# EAGLE board PCB0M8B3 (EAGLE 6.2)
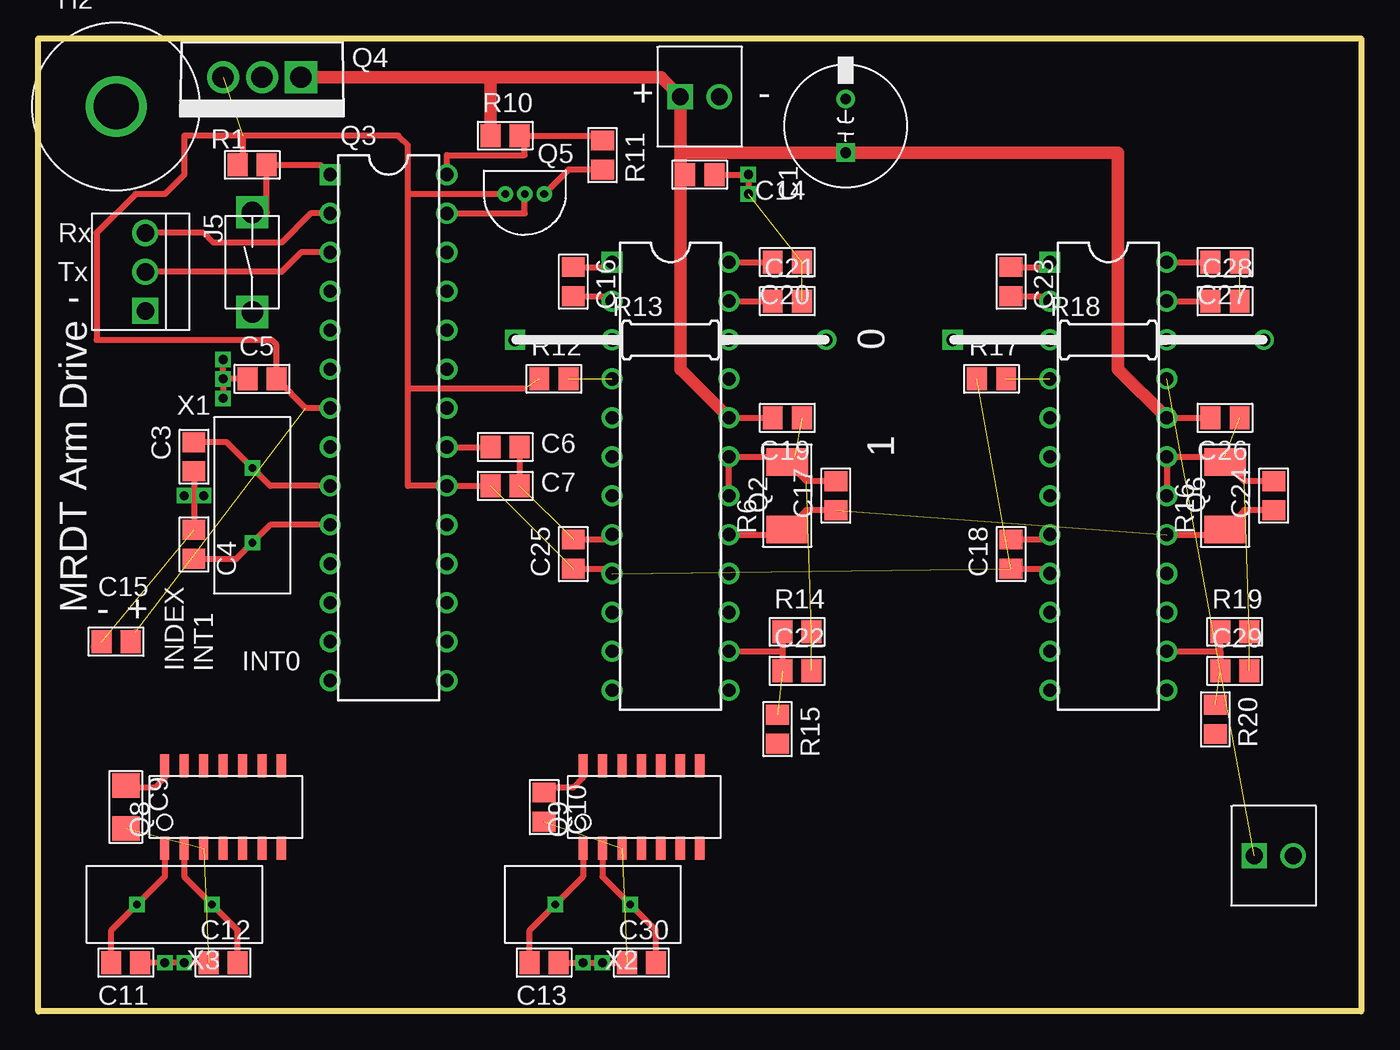
[diagram p0: board, top side]
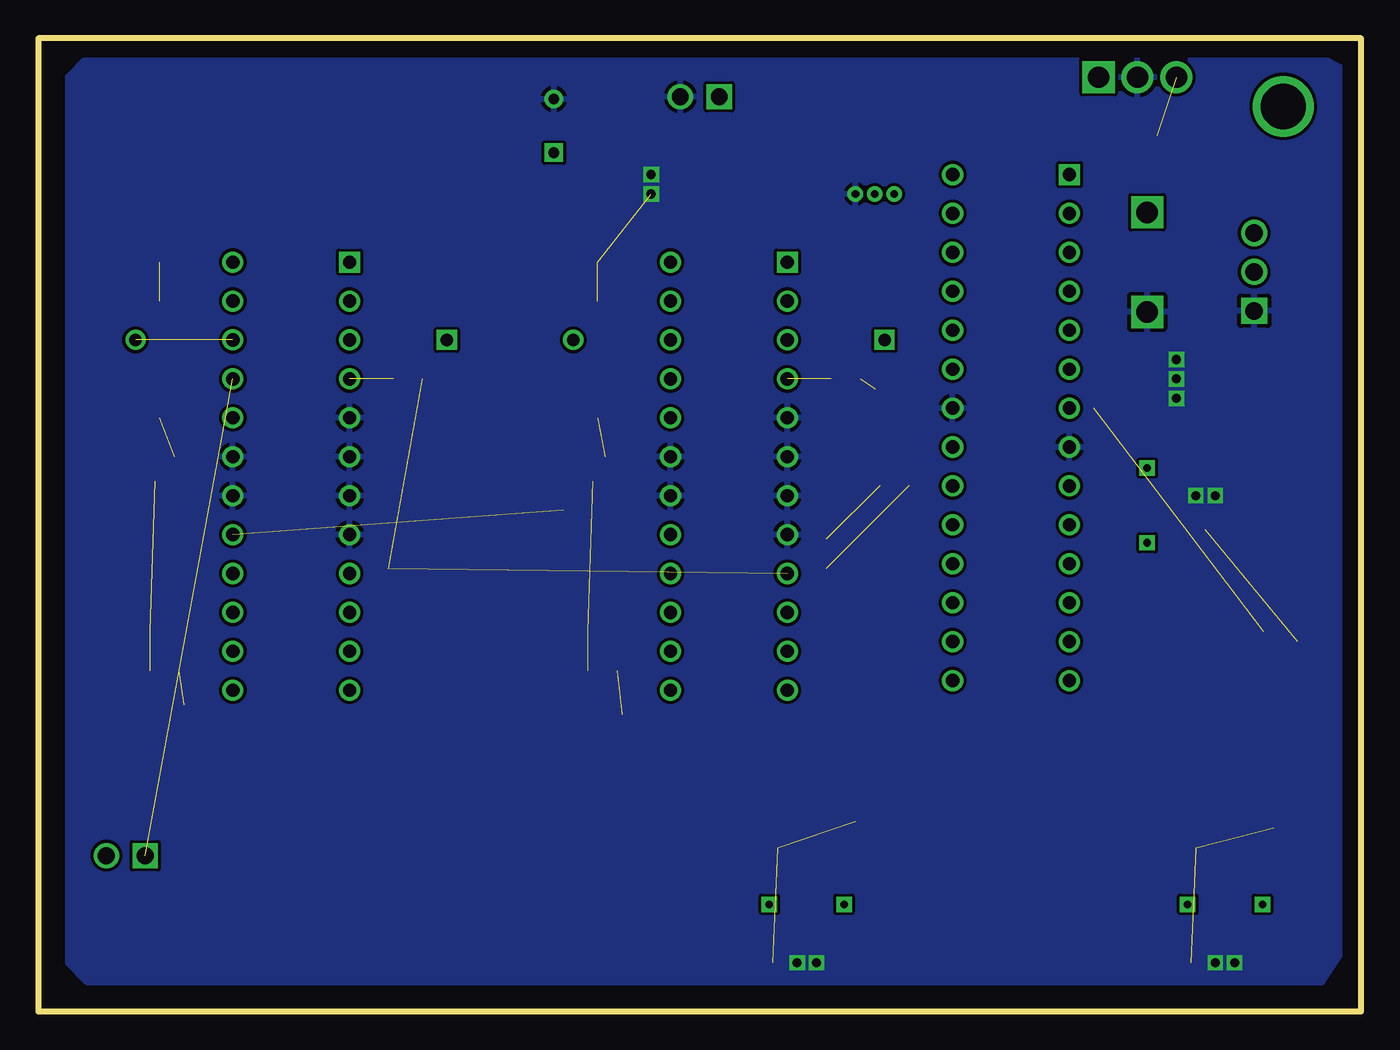
[diagram p1: board, bottom side, seen from below]

Size 86.36 x 63.5 mm. Coordinates in mm from the lower left corner, seen from the top.
Outline: 0,0 0,63.5 86.36,63.5 86.36,0 0,0
Copper layers (1*16): Top 0.035mm / dielectric 1.5mm / Bottom 0.035mm
Design rules: minimum track width 10mil, minimum drill 15mil, track to track 8mil, track to pad 8mil, pad to pad 8mil, via to via 8mil, smd to smd 8mil, copper to edge 40mil, drill to drill 8mil, minimum pad ring 10mil, minimum via ring 8mil, stop-mask expansion 4mil, vias tented up to drill 0mil, thermal gap 10mil

## Footprints (pad centres in the part's own frame; a part is rotated, then mirrored left to right if it is on the bottom)
C_8MM = drill 0.7 square: + -1.75,0 | drill 0.7: - 1.75,0
C_0805 = smd 1.3 x 1.5: 1 -0.95,0; 2 0.95,0
C_1206 = smd 1.6 x 1.8: 1 -1.4,0; 2 1.4,0
H_MNTHOLE_#4 = drill 2.946: 1 0,0
J_2.54MM = drill 1.1 square: P$1 -1.27,0 | drill 1.1: P$2 1.27,0
J_TOGGLE = drill 1.4 square: P$1 -3.25,0; P$2 3.25,0
J_MTA100_3P = drill 1.143 square: 1 2.54,0 | drill 1.143: 2 0,0; 3 -2.54,0
DIP24 = drill 0.864 square: 1 -16.51,-3.81 | drill 0.864: 2 -13.97,-3.81; 3 -11.43,-3.81; 4 -8.89,-3.81; 5 -6.35,-3.81; 6 -3.81,-3.81; 7 -1.27,-3.81; 8 1.27,-3.81; 9 3.81,-3.81; 10 6.35,-3.81; 11 8.89,-3.81; 12 11.43,-3.81; 13 11.43,3.81; 14 8.89,3.81; 15 6.35,3.81; 16 3.81,3.81; 17 1.27,3.81; 18 -1.27,3.81; 19 -3.81,3.81; 20 -6.35,3.81; 21 -8.89,3.81; 22 -11.43,3.81; 23 -13.97,3.81; 24 -16.51,3.81
DIP28 = drill 0.864 square: 1 -16.51,-3.81 | drill 0.864: 2 -13.97,-3.81; 3 -11.43,-3.81; 4 -8.89,-3.81; 5 -6.35,-3.81; 6 -3.81,-3.81; 7 -1.27,-3.81; 8 1.27,-3.81; 9 3.81,-3.81; 10 6.35,-3.81; 11 8.89,-3.81; 12 11.43,-3.81; 13 13.97,-3.81; 14 16.51,-3.81; 15 16.51,3.81; 16 13.97,3.81; 17 11.43,3.81; 18 8.89,3.81; 19 6.35,3.81; 20 3.81,3.81; 21 1.27,3.81; 22 -1.27,3.81; 23 -3.81,3.81; 24 -6.35,3.81; 25 -8.89,3.81; 26 -11.43,3.81; 27 -13.97,3.81; 28 -16.51,3.81
TO-220 = drill 1.397 square: 1 -2.54,0 | drill 1.397: 2 0,0; 3 2.54,0
TO-92-3 = drill 0.5: 1 1.27,0; 2 0,0; 3 -1.27,0
SOIC14 = smd 1.5 x 0.6: 1 -2.7,0; 2 -2.7,-1.27; 3 -2.7,-2.54; 4 -2.7,-3.81; 5 -2.7,-5.08; 6 -2.7,-6.35; 7 -2.7,-7.62; 8 2.7,-7.62; 9 2.7,-6.35; 10 2.7,-5.08; 11 2.7,-3.81; 12 2.7,-2.54; 13 2.7,-1.27; 14 2.7,0
R_0805 = smd 1.3 x 1.5: 1 -0.95,0; 2 0.95,0
R_2010 = smd 1.8 x 2.7: 1 -2.2,0; 2 2.2,0
R_1/4WL = drill 0.8 square: 1 -10.16,0 | drill 0.8: 2 10.16,0
HC-49 = drill 0.5 square: P$1 -2.44,0; P$2 2.44,0

## Placement (x,y rotation side)
C1  330uF  [C_8MM]  52.7,57.78 90 top
C3  15pF  [C_0805]  10.16,36.2 90 top
C4  [C_0805]  10.16,30.48 270 top
C5  [C_0805]  14.61,41.27 0 top
C6  [C_0805]  30.48,36.83 0 top
C7  [C_0805]  30.48,34.29 0 top
C9  [C_1206]  5.71,13.34 270 top
C10  [C_0805]  33.02,13.34 270 top
C11  [C_0805]  5.71,3.17 180 top
C12  [C_0805]  12.06,3.17 0 top
C13  [C_0805]  33.02,3.17 180 top
C14  [C_0805]  43.18,54.61 0 top
C15  [C_0805]  5.08,24.13 180 top
C16  0.22uF  [C_0805]  34.92,47.62 270 top
C17  [C_0805]  52.07,33.66 90 top
C18  [C_0805]  63.5,29.84 90 top
C19  [C_0805]  48.9,38.73 180 top
C20  [C_0805]  48.9,48.9 180 top
C21  [C_0805]  48.9,46.35 0 top
C22  0.1uF  [C_0805]  49.53,22.23 0 top
C23  0.22uF  [C_0805]  63.5,47.62 270 top
C24  [C_0805]  80.64,33.66 90 top
C25  [C_0805]  34.92,29.84 90 top
C26  [C_0805]  77.47,38.73 180 top
C27  [C_0805]  77.47,48.9 180 top
C28  [C_0805]  77.47,46.35 0 top
C29  0.1uF  [C_0805]  78.11,22.23 0 top
C30  [C_0805]  39.37,3.17 0 top
H1  [H_MNTHOLE_#4]  106.05,34.92 0 top  (outside the outline)
H2  [H_MNTHOLE_#4]  5.08,59.05 0 top
J1  J_1546074-2282834-2  [J_2.54MM]  43.18,59.69 0 top
J2  J_1546074-2282834-2  [J_2.54MM]  80.64,10.16 0 top
J4  J_MC32857  [J_TOGGLE]  13.97,48.9 90 top
J5  [J_MTA100_3P]  6.99,48.26 270 top
Q2  A3959  [DIP24]  41.27,32.38 270 top
Q3  ATMEGA328P  [DIP28]  22.86,38.1 270 top
Q4  LDO  [TO-220]  14.61,60.96 180 top
Q5  LM35  [TO-92-3]  31.75,53.34 0 top
Q6  A3959  [DIP24]  69.85,32.38 270 top
Q8  Q_LFLS7366R-S  [SOIC14]  8.26,13.34 90 top
Q9  Q_LFLS7366R-S  [SOIC14]  35.56,13.34 90 top
R1  200  [R_0805]  13.97,55.24 180 top
R6  [R_2010]  48.9,33.66 90 top
R10  [R_0805]  30.48,57.15 0 top
R11  [R_0805]  36.83,55.88 270 top
R12  51k  [R_0805]  33.66,41.27 0 top
R13  [R_1/4WL]  41.27,43.81 0 top
R14  10k  [R_0805]  49.53,24.77 0 top
R15  1k  [R_0805]  48.26,18.41 270 top
R16  [R_2010]  77.47,33.66 90 top
R17  51k  [R_0805]  62.23,41.27 0 top
R18  [R_1/4WL]  69.85,43.81 0 top
R19  10k  [R_0805]  78.11,24.77 0 top
R20  1k  [R_0805]  76.83,19.05 270 top
X1  HC49S  [HC-49]  13.97,33.02 90 top
X2  X_HC49SCRYSTAL  [HC-49]  36.2,6.99 180 top
X3  X_HC49SCRYSTAL  [HC-49]  8.89,6.99 180 top

## Library data of the parts
C1 J1 J2 J4 Q2-Q6 Q8 Q9 R13 R18 X1-X3 = PCB0M1
C3-C7 C9-C30 R1 R6 R10-R12 R14-R17 R19 R20 = Lib_Passive
H1 H2 J5 = Lib_TH

## Nets
D: J5.2 Q3.3
GND: C1.- C3.1 C4.1 C5.1 C6.2 C7.2 C9.2 C10.2 C11.1 C12.1 C13.1 C14.2 C15.2 C17.2 C18.2 C19.1 C20.1 C21.2 C22.2 C24.2 C25.2 C26.1 C29.2 C30.1 J1.P$2 J4.P$1 J5.1 Q2.5 Q2.6 Q2.7 Q2.8 Q2.18 Q2.19 Q3.8 Q3.22 Q4.2 Q5.1 Q6.5 Q6.6 Q6.7 Q6.8 Q6.18 Q6.19 Q8.3 Q9.3 R6.2 R11.2 R14.2 R16.2 R19.2
ISENSE: C17.1 C24.1 Q2.17 Q6.17 R6.1 R16.1
N$1: C4.2 Q3.10 X1.P$1
N$2: C3.2 Q3.9 X1.P$2
N$3: C9.1 Q8.14
N$4: Q3.27 Q5.2
N$5: Q3.28 R10.2 R11.1
N$6: C6.1 Q3.21
N$8: J4.P$2 Q3.1 R1.1
N$9: C10.1 Q9.14
N$10: C12.2 Q8.2 X3.P$1
N$11: C16.1 Q2.1
N$12: C16.2 Q2.2
N$13: C11.2 Q8.1 X3.P$2
N$14: Q2.4 R12.2
N$15: C20.2 Q2.24
N$16: C21.1 Q2.23
N$17: Q2.22 R13.2
N$18: C23.1 Q6.1
N$19: C13.2 Q9.1 X2.P$2
N$20: C23.2 Q6.2
N$21: C30.2 Q9.2 X2.P$1
N$22: Q6.4 R17.2
N$23: C27.2 Q6.24
N$24: C28.1 Q6.23
N$25: Q6.22 R18.2
N$26: C27.1 C28.2
OUTA: J2.P$2
OUTB: J2.P$1 Q6.21
R: J5.3 Q3.2
REF2: C22.1 Q2.14 R14.1 R15.1
REF3: C29.1 Q6.14 R19.1 R20.1
V5: C5.2 C7.1 C15.1 C18.1 C25.1 Q2.9 Q3.7 Q3.20 Q4.3 Q5.3 Q6.9 R1.2 R12.1 R17.1
VIN: C1.+ C14.1 C19.2 C26.2 J1.P$1 Q2.20 Q4.1 Q6.20 R10.1

## Tracks (layer width: path | path; a pad name or v marks a point on that pad's centre or on a via)
D
  Top 0.406: Q3.3 17.14,49.53 15.88,48.26 J5.2
GND  (via drill 0.6)  (14 unrouted)
  Top 0.406: C6.2 C7.2 | R11.2 34.61,54.93 Q5.1 | C5.1 v12.06,41.27 | v12.06,41.27 v12.06,42.55 | v12.06,41.27 v12.06,40.01 | C14.2 v46.35,54.61 v46.35,53.34 | C3.1 10.16,33.66 | v10.79,33.66 10.16,33.66 | v9.53,33.66 10.16,33.66 | 10.16,33.66 C4.1 | C13.1 v35.56,3.17 v36.83,3.17 C30.1 | C12.1 v9.53,3.17 v8.26,3.17 C11.1 | C17.2 50.15,34.6 49.36,35.39 | 49.36,35.39 R6.2 | C24.2 78.72,34.6 R16.2 77.47,36.2 Q6.19 Q6.18 | C25.2 37.15,30.8 Q2.8 | C18.2 65.72,30.8 Q6.8 | 49.36,35.39 49.36,36.2 Q2.19 Q2.18
  Top 0.813: 3.81,23.81 C15.2
  pour Bottom: 1.27,61.59 2.54,62.23 83.19,62.23 84.45,60.96 84.45,3.17 83.19,1.91 2.54,1.91 1.27,3.81
ISENSE  (1 unrouted)
  Top 0.406: C17.1 50.15,32.7 R6.1 48.9,31.11 Q2.17 | C24.1 78.72,32.7 R16.1 77.47,31.11 Q6.17
N$1
  Top 0.406: Q3.10 15.14,31.75 X1.P$1 12.92,29.53 C4.2
N$2
  Top 0.406: Q3.9 15.14,34.29 X1.P$2 12.29,37.15 C3.2
N$3
  Top 0.406: Q8.14 8.26,15.24 7.62,14.61 5.84,14.61 C9.1
N$4
  Top 0.406: Q3.27 31.75,52.07 Q5.2
N$5
  Top 0.406: Q3.28 26.67,55.88 31.75,55.88 31.75,57.15 | R10.2 31.75,57.15 | 31.75,57.15 36.51,57.15 R11.1
N$6
  Top 0.406: Q3.21 C6.1
N$8
  Top 0.406: J4.P$2 14.92,52.15 R1.1 18.41,55.24 Q3.1
N$9
  Top 0.406: Q9.14 35.56,15.24 34.92,14.61 33.34,14.61 C10.1
N$10
  Top 0.406: Q8.2 9.53,8.79 X3.P$1 13.02,5.3 C12.2
N$11
  Top 0.406: C16.1 37.15,48.58 Q2.1
N$12
  Top 0.406: C16.2 37.15,46.67 Q2.2
N$13
  Top 0.406: Q8.1 8.26,8.79 X3.P$2 4.76,5.3 C11.2
N$14  (1 unrouted)
N$15
  Top 0.406: Q2.24 C20.2
N$16
  Top 0.406: Q2.23 C21.1
N$17
  Top 0.406: R13.2 Q2.22
N$18
  Top 0.406: C23.1 65.72,48.58 Q6.1
N$19
  Top 0.406: C13.2 32.07,5.3 X2.P$2 35.56,8.79 Q9.1
N$20
  Top 0.406: C23.2 65.72,46.67 Q6.2
N$21
  Top 0.406: Q9.2 36.83,8.79 X2.P$1 40.32,5.3 C30.2
N$22  (1 unrouted)
N$23
  Top 0.406: Q6.24 C27.2
N$24
  Top 0.406: Q6.23 C28.1
N$25  (1 unrouted)
N$26  (1 unrouted)
OUTB  (1 unrouted)
R
  Top 0.406: Q3.2 17.78,52.07 15.88,50.16 11.43,50.16 10.79,50.8 J5.3
REF2  (1 unrouted)
  Top 0.406: Q2.14 48.58,23.5 | 48.58,23.5 C22.1 | R14.1 48.58,23.5
REF3  (1 unrouted)
  Top 0.406: Q6.14 77.16,23.5 | 77.16,23.5 C29.1 | 77.16,23.5 R19.1
V5  (6 unrouted)
  Top 0.406: C7.1 Q3.20 24.13,34.29 24.13,40.64 | 24.13,40.64 24.13,53.34 | C15.1 6.35,24.13 6.35,24.77 | 31.75,40.64 24.13,40.64 | Q5.3 24.13,53.34 | 24.13,53.34 24.13,56.52 23.5,57.15 13.34,57.15 | 17.78,39.37 Q3.7 17.46,39.37 C5.2 15.55,43.5 15.24,43.81 3.81,43.81 3.81,50.8 6.35,53.34 8.26,53.34 9.53,54.61 9.53,57.15 13.34,57.15 | 13.34,57.15 13.34,55.24 R1.2 12.7,55.24 | C25.1 37.15,28.89 Q2.9 | C18.1 65.72,28.89 Q6.9
VIN
  Top 0.406: Q2.20 C19.2 | Q6.20 C26.2
  Top 0.813: 41.91,53.98 41.91,54.29 | 41.91,54.29 C14.1 42.23,54.3 41.91,53.98 | 41.91,54.29 41.91,56.03 | 41.91,56.03 J1.P$1 40.64,60.96 29.21,60.96 | 29.21,60.96 29.53,60.64 R10.1 | 41.91,56.03 C1.+ 70.48,56.03 70.48,41.91 Q6.20 | 41.91,53.98 41.91,41.91 Q2.20 | Q4.1 29.21,60.96

## Text on the board
tPlace: + | - | Rx | Tx | - | 0 | 1 | MRDT Arm Drive | INT1 | - | + | INT0 | INDEX